# Altium PCB LM2596.PcbDoc
Units mm, origin at the board's own origin, x right, y up, seen from the top; angles counter-clockwise.
Board outline 45 x 31 mm, 2 copper layers (Top Layer, Bottom Layer), stack 1.471 mm thick; 7 components, 5 nets, 26 pads, 50 vias.
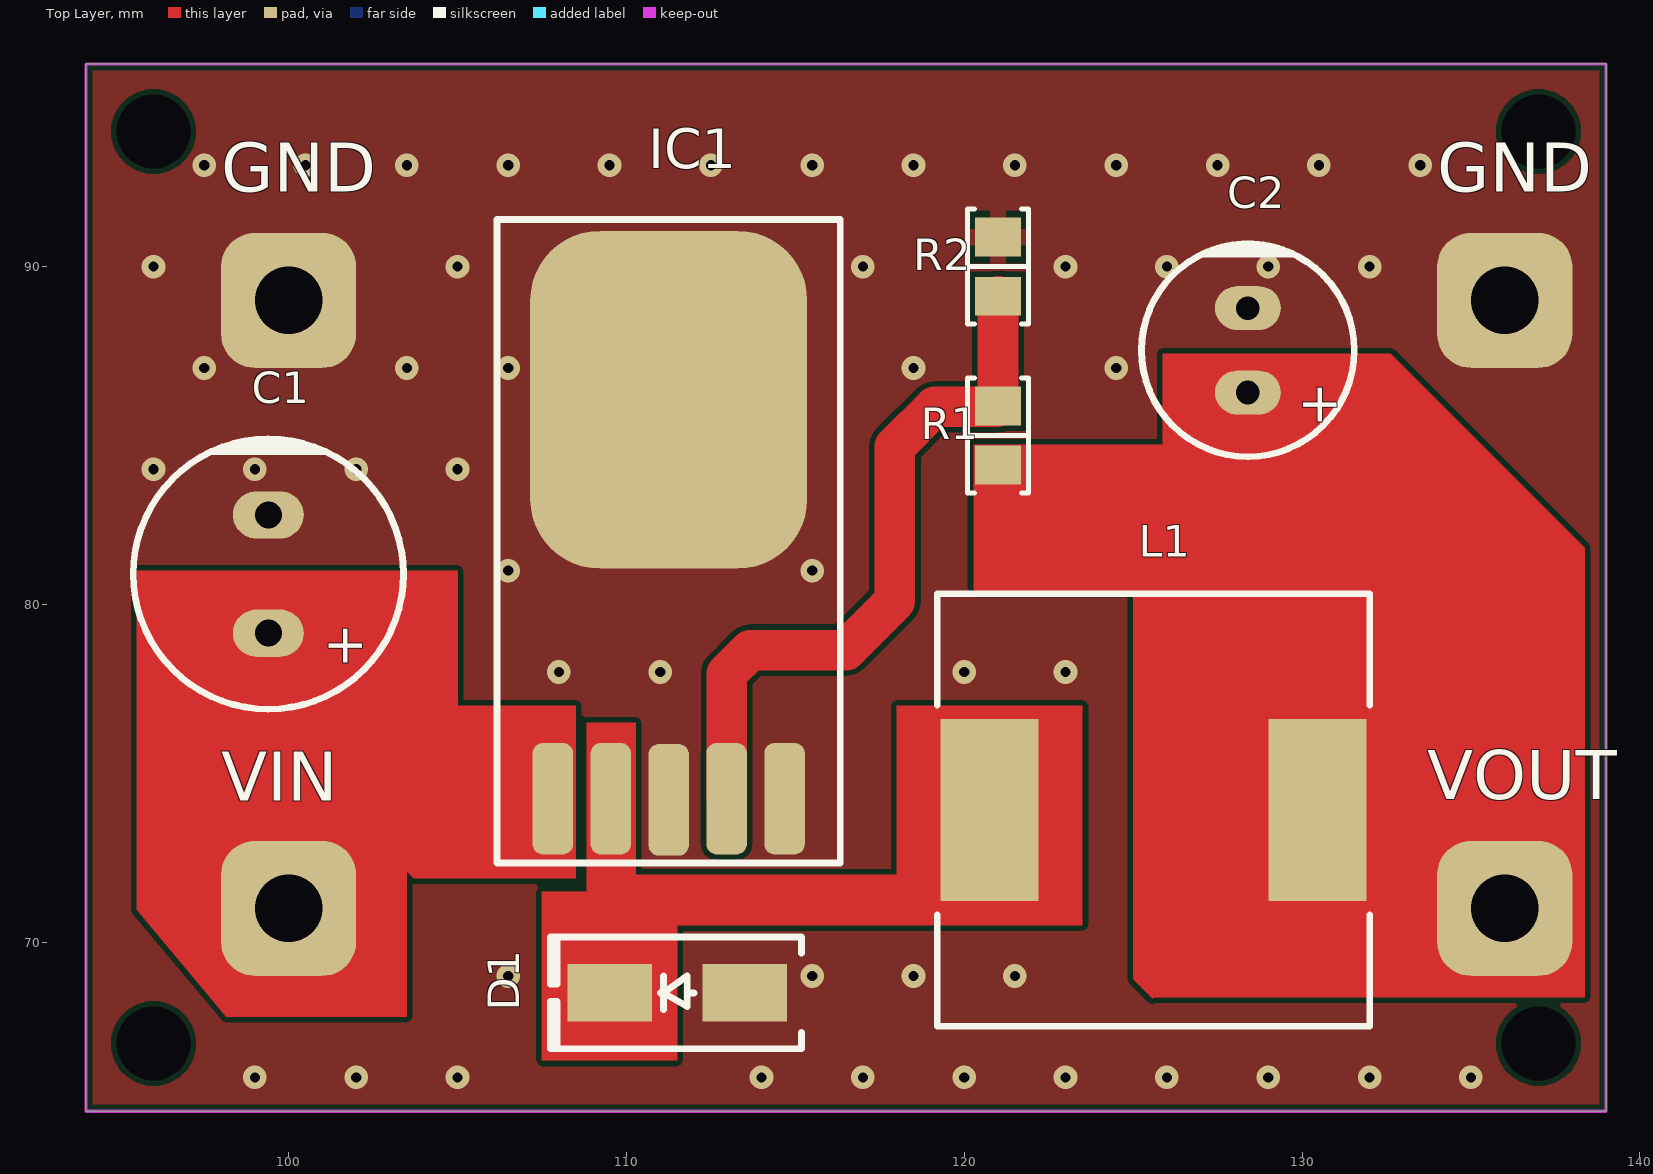
[diagram p0: Top Layer view]
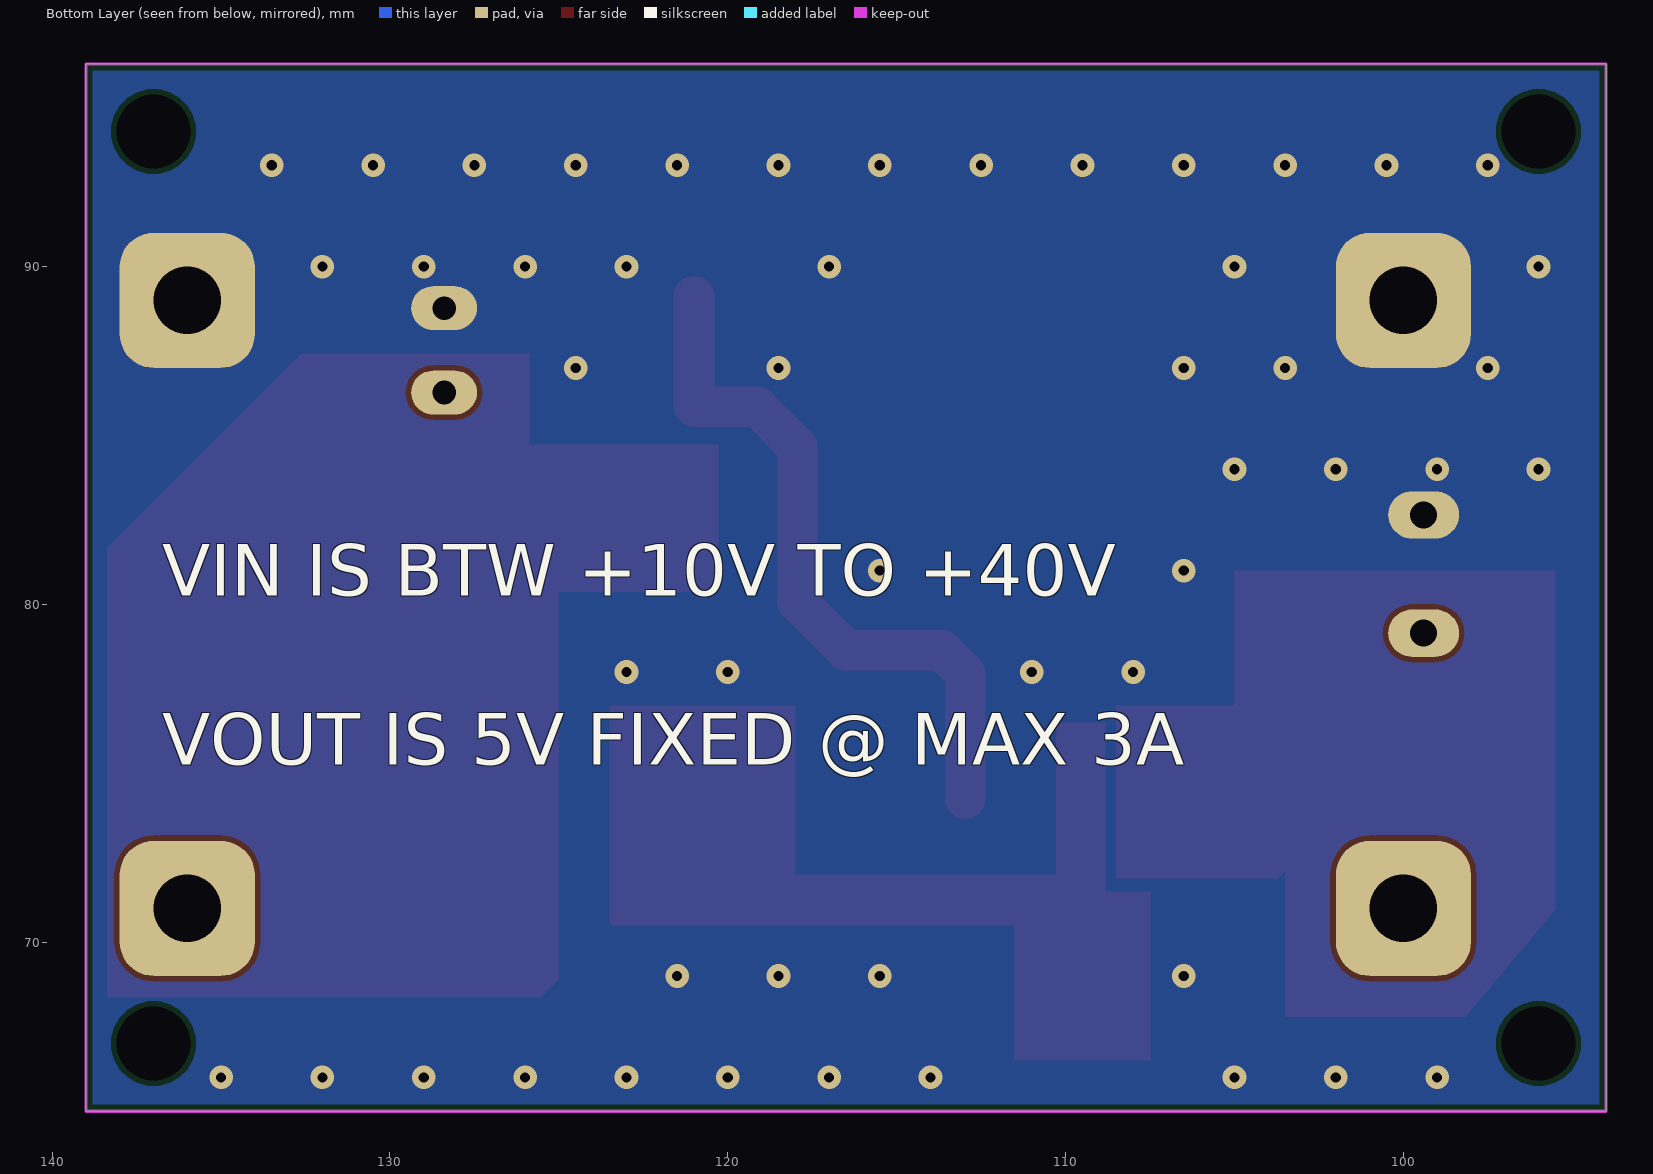
[diagram p1: Bottom Layer view, seen from below]
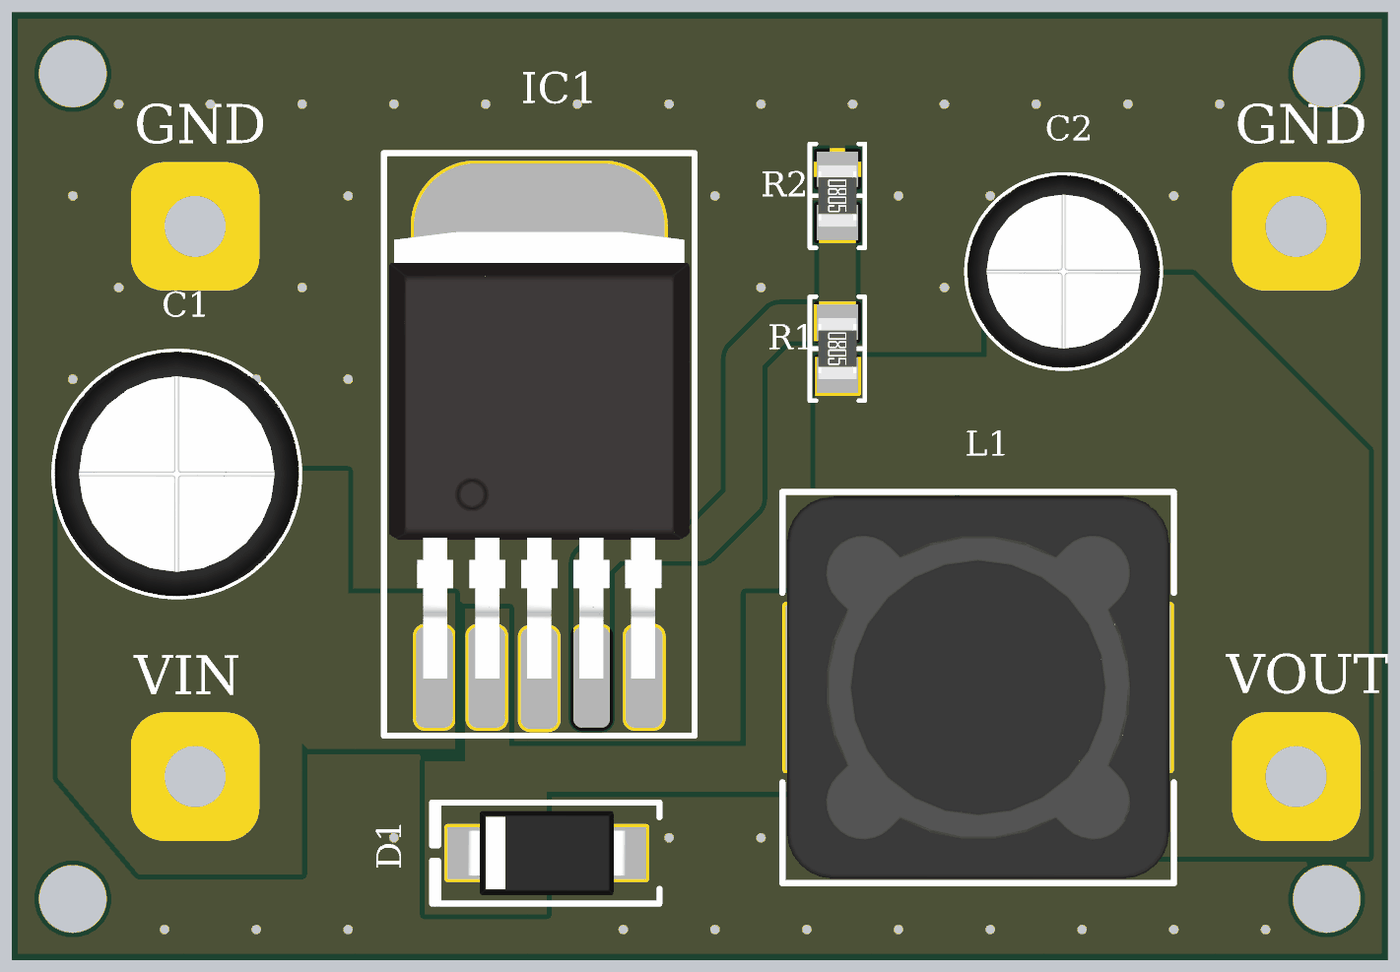
[diagram p2: 3D render of the assembled board from above, using the file's embedded part models]

## Layer stack, top to bottom
Top Solder: solder mask 0.0102, Solder Resist, Dk 3.5
Top Layer: signal copper 0.0356
Dielectric 1: dielectric 1.4, FR-4, Dk 4.8
Bottom Layer: signal copper 0.0356
Bottom Solder: solder mask 0.0102, Solder Resist, Dk 3.5

## Board outline
94,65 94,96 139,96 139,65

## Design rules (kind name [scope] priority, off if disabled: settings)
Clearance [All] p1: gap=0.152 ignorepadtopadclearanceinfootprint=FALSE
ComponentClearance [All] p1: gap=0.2 collisioncheckmode=3 verticalgap=0.2 showdistances=FALSE
HoleSize [All] p1: absolutevalues=TRUE maxlimit=5 minlimit=0.025 maxpercent=80.000 minpercent=20.000
PolygonConnect [All] p1: thpad.connectstyle=Direct thpad.reliefconductorwidth=0.254 thpad.reliefentries=4 thpad.polygonreliefangle="90 Angle" thpad.airgapwidth=0.254 smdpad.connectstyle=Relief smdpad.reliefconductorwidth=0.5 smdpad.reliefentries=4 smdpad.polygonreliefangle="90 Angle" smdpad.airgapwidth=0.2 via.connectstyle=Direct via.reliefconductorwidth=0.254 via.reliefentries=4 via.polygonreliefangle="90 Angle" via.airgapwidth=0.254
RoutingVias [All] p1: holewidth=0.711 width=1.27 viastyle="Through Hole" minholewidth=0.711 minwidth=1.27 maxholewidth=0.711 maxwidth=1.27
SolderMaskExpansion [All] p1: expansion=0.102 istentingtop=FALSE
Width [All] p1: maxlimit=2 minlimit=0.152 preferedwidth=0.5
28 further rules are at their usual default settings.

## Components (designator, comment, footprint, x,y, rotation, side; value= is the part's Value field where it differs from the comment)
C1 "100µF" "CAP TH ALUM ELEC D8.00mm S3.50mm H12.50mm" 99.4,80.9 r270 top
C2 "220µF" "CAP TH ALUM ELEC D6.30mm S2.50mm H12.50mm" 128.397,87.523 r270 top
D1 "ACDBA560-HF" "DO214AC SMA" 111.5,68.5 r180 top
IC1 "LM2596" LM2596 111.252,80.137 r0 top
L1 "33µH" "BOURNS SRR1280" 125.603,73.914 r0 top
R1 "3 kOhms" "RES 0805_2012" 121,85 r270 top
R2 "1 kOhms" "RES 0805_2012" 121,90 r270 top

## Footprints (in the part's own frame and the unit in brackets; to place one, negate y for a bottom-side part, rotate by r counter-clockwise, add the part's x,y. Pads: shape width x height; smd on the part's side, far side on the other; paste and mask are expansions set on the pad)
"BOURNS SRR1280" [mm] "Precision Wire Wound Inductor, 2-Leads, Body 12.50x12.50mm, IPC Medium Density"
  rect 2.9x5.4 smd: 1(-4.85,0) 2(4.85,0)
  silkscreen extent -6.4,-6.4 6.4,6.4, body extent -6.25,-6.25 6.25,6.25, height 7.9
"CAP TH ALUM ELEC D6.30mm S2.50mm H12.50mm" [mm] "6.3mm Diameter 2.5mm Lead Spacing Aluminum Electrolytic Capacitors Radial, Can"
  oval 1.3x1.95 hole 0.7: 1(1.25,0) 2(-1.25,0)
  silkscreen extent -3.15,-3.15 3.15,3.15, body extent -3.16,-3.15 3.15,3.15, height 12.5
"CAP TH ALUM ELEC D8.00mm S3.50mm H12.50mm" [mm] "8mm Diameter 3.5mm Lead Spacing Aluminum Electrolytic Capacitors Radial, Can"
  oval 1.4x2.1 hole 0.8: 1(1.75,0) 2(-1.75,0)
  silkscreen extent -4,-4 4,4, body extent -4.01,-4 4,4, height 12.5
"DO214AC SMA" [mm] "Molded Diode, 2-Leads, Body 4.30x2.60mm, IPC Medium Density"
  rect 2.5x1.7 smd: 1(-2,0) 2(2,0)
  silkscreen extent -3.68,-1.65 3.75,1.65, body extent -2.6,-1.37 2.6,1.37, height 2.4
LM2596 [mm]
  rrect50% 1.2x3.3 smd: 1(-3.429,-5.888) 2(-1.714,-5.888) 3(0,-5.923) 4(1.714,-5.888) 5(3.429,-5.888)
  rrect50% 8.2x10 smd: 3(0,5.923)
  silkscreen extent -5.08,-7.79 5.08,11.26, body extent -4.91,-5.92 4.91,8.68, height 4.22
"RES 0805_2012" [mm] "Chip Resistor, 2-Leads, Body 2.00x1.25mm, IPC Medium Density"
  rect 1.15x1.35 smd: 1(-0.875,0) 2(0.875,0)
  silkscreen extent -1.7,-0.9 1.7,0.9, body extent -1,-0.62 1,0.63, height 0.6

## Part data
C1: library part ECA-1HM101, "CAP ALUM 100UF 20% 50V RADIAL", Device Package="Radial, Can", Lifetime @ Temp.="2000 Hrs @ 85°C", Manufacturer="Panasonic Electronic Components", Operating Temperature="-40°C ~ 85°C", Ripple Current @ High Frequency="425mA @ 10kHz", Ripple Current @ Low Frequency="250mA @ 120Hz", Supplier Part Number 1=P5182-ND, Tolerance=±20%, Voltage - Rated=50V, Applications="General Purpose", Capacitance=100µF, ComponentLink1Description=Datasheet, ComponentLink1URL=//media.digikey.com/pdf/Data%20Sheets/Panasonic%20Electronic%20Components/ECA-xxM%20Series,TypeA.pdf, ComponentLink2Description="DigiKey Link", ComponentLink2URL=http://digikey.com/product-detail/en/panasonic-electronic-components/ECA-1HM101/P5182-ND/245041, Height - Seated (Max)="0.492\" (12.50mm)", LastUpdated="7.09.2020 05:24:52", Lead Spacing="0.138\" (3.50mm)", Lifecycle Status=Active, Minimum Order=1, Mounting Type="Through Hole", Package / Case="Radial, Can", Packaging=Bulk, Part Number=ECA-1HM101, Part Status=Active, PartId=7199, Polarization=Polar, Price=0.31, Series=M, Size / Dimension="0.315\" Dia (8.00mm)", Supplier 1=DigiKey
C2: library part 25YXJ220M6.3X11, "CAP ALUM 220UF 20% 25V RADIAL", Device Package="Radial, Can", Lifetime @ Temp.="7000 Hrs @ 105°C", Manufacturer=Rubycon, Operating Temperature="-40°C ~ 105°C", Ripple Current @ High Frequency="400mA @ 100kHz", Ripple Current @ Low Frequency="280mA @ 120Hz", Supplier Part Number 1=1189-2913-ND, Tolerance=±20%, Voltage - Rated=25V, Applications="General Purpose", Capacitance=220µF, ComponentLink1Description=Datasheet, ComponentLink1URL=http://www.rubycon.co.jp/en/catalog/e_pdfs/aluminum/e_yxj.pdf, ComponentLink2Description="DigiKey Link", ComponentLink2URL=http://digikey.com/product-detail/en/rubycon/25YXJ220M6.3X11/1189-2913-ND/3563124, Height - Seated (Max)="0.492\" (12.50mm)", LastUpdated="4.09.2020 01:05:50", Lead Spacing="0.098\" (2.50mm)", Lifecycle Status=Active, Minimum Order=1, Mounting Type="Through Hole", Package / Case="Radial, Can", Packaging=Bulk, Part Number=25YXJ220M6.3X11, Part Status=Active, PartId=20944, Polarization=Polar, Price=0.27, Series=YXJ, Size / Dimension="0.248\" Dia (6.30mm)", Supplier 1=DigiKey, Impedance="220 mOhms"
D1: "DIODE SCHOTTKY 60V 5A DO214AC", Capacitance @ Vr, F="250pF @ 4V, 1MHz", Current - Average Rectified (Io)="5A (DC)", Current - Reverse Leakage @ Vr="500µA @ 60V", Manufacturer="Comchip Technology", Operating Temperature - Junction="-55°C ~ 125°C", Package / Case="DO-214AC, SMA", Supplier Device Package="DO-214AC (SMA)", Supplier Part Number 1=641-2078-1-ND, Voltage - DC Reverse (Vr) (Max)=60V, Voltage - Forward (Vf) (Max) @ If="700mV @ 5A", ComponentLink1Description=Datasheet, ComponentLink1URL=http://www.comchiptech.com/admin/files/product/ACDBA560-HF%20RevA201382.pdf, ComponentLink2Description="DigiKey Link", ComponentLink2URL=http://digikey.com/product-detail/en/comchip-technology/ACDBA560-HF/641-2078-1-ND/10131664, Diode Type=Schottky, LastUpdated="2.09.2020 01:19:04", Lifecycle Status=Active, Minimum Order=1, Mounting Type="Surface Mount", Packaging=TapeAndReel, Part Number=ACDBA560-HF, Part Status=Active, PartId=1832, Price=0.13, Series="Automotive, AEC-Q101", Speed="Fast Recovery =< 500ns, > 200mA (Io)", Supplier 1=DigiKey
L1: library part SRR1280-330M, "FIXED IND 33UH 3.5A 57 MOHM SMD", Current - Saturation=3.3A, Current Rating (Amps)=3.5A, DC Resistance (DCR)="57mOhm Max", Device Package=Nonstandard, Frequency - Self Resonant=9.5MHz, Manufacturer="Bourns Inc.", Operating Temperature="-40°C ~ 125°C", Q @ Freq="28 @ 2.52MHz", Supplier Part Number 1=SRR1280-330MCT-ND, Tolerance=±20%, Inductance Frequency - Test=100kHz, ComponentLink1Description=Datasheet, ComponentLink1URL=https://www.bourns.com/docs/Product-Datasheets/SRR1280.pdf, ComponentLink2Description="DigiKey Link", ComponentLink2URL=http://digikey.com/product-detail/en/bourns-inc/SRR1280-330M/SRR1280-330MCT-ND/2127440, Height - Seated (Max)="0.315\" (8.00mm)", LastUpdated="2.09.2020 01:22:09", Lifecycle Status=Active, Material - Core=Ferrite, Minimum Order=1, Mounting Type="Surface Mount", Package / Case=Nonstandard, Packaging=TapeAndReel, Part Number=SRR1280-330M, Part Status=Active, PartId=25, Price=0.65, Series=SRR1280, Shielding=Shielded, Size / Dimension="0.492\" L x 0.492\" W (12.50mm x 12.50mm)", Supplier 1=DigiKey, Type=Wirewound, Inductance=33µH
R1: library part RPC0805JT3K00, "RES 3K OHM 5% 1/4W 0805", Device Package="0805 (2012 Metric)", Manufacturer="Stackpole Electronics Inc", Operating Temperature="-55°C ~ 155°C", Power (Watts)="0.25W, 1/4W", Ratings=AEC-Q200, Supplier Device Package=0805, Supplier Part Number 1=RPC0805JT3K00CT-ND, Temperature Coefficient=±100ppm/°C, Tolerance=±5%, ComponentLink1Description=Datasheet, ComponentLink1URL=https://www.seielect.com/catalog/sei-rpc.pdf, ComponentLink2Description="DigiKey Link", ComponentLink2URL=http://digikey.com/product-detail/en/stackpole-electronics-inc/RPC0805JT3K00/RPC0805JT3K00CT-ND/5766019, Composition="Thick Film", Features="Automotive AEC-Q200, Pulse Withstanding", Height - Seated (Max)="0.024\" (0.60mm)", LastUpdated="2.09.2020 01:14:56", Lifecycle Status=Active, Minimum Order=1, Number of Terminations=2, Package / Case="0805 (2012 Metric)", Packaging=TapeAndReel, Part Number=RPC0805JT3K00, Part Status=Active, PartId=40639, Price=0.02, Resistance="3 kOhms", Series=RPC, Size / Dimension="0.079\" L x 0.049\" W (2.00mm x 1.25mm)", Supplier 1=DigiKey
R2: library part RPC0805JT1K00, "RES 1K OHM 5% 1/4W 0805", Device Package="0805 (2012 Metric)", Manufacturer="Stackpole Electronics Inc", Operating Temperature="-55°C ~ 155°C", Power (Watts)="0.25W, 1/4W", Ratings=AEC-Q200, Supplier Device Package=0805, Supplier Part Number 1=RPC0805JT1K00CT-ND, Temperature Coefficient=±100ppm/°C, Tolerance=±5%, ComponentLink1Description=Datasheet, ComponentLink1URL=https://www.seielect.com/catalog/sei-rpc.pdf, ComponentLink2Description="DigiKey Link", ComponentLink2URL=http://digikey.com/product-detail/en/stackpole-electronics-inc/RPC0805JT1K00/RPC0805JT1K00CT-ND/3043931, Composition="Thick Film", Features="Automotive AEC-Q200, Pulse Withstanding", Height - Seated (Max)="0.024\" (0.60mm)", LastUpdated="2.09.2020 01:14:52", Lifecycle Status=Active, Minimum Order=1, Number of Terminations=2, Package / Case="0805 (2012 Metric)", Packaging=TapeAndReel, Part Number=RPC0805JT1K00, Part Status=Active, PartId=42221, Price=0.02, Resistance="1 kOhms", Series=RPC, Size / Dimension="0.079\" L x 0.049\" W (2.00mm x 1.25mm)", Supplier 1=DigiKey

## Free pads (board coordinates)
  rrect50% 0x0 hole 2.2: GND(96,67) GND(96,94) GND(137,67) GND(137,94)
  rrect50% 4x4 hole 2: GND(100,89) GND(136,89) VIN(100,71) VOUT(136,71)

## Via types
v1: diameter 0.7, hole 0.3, Top Layer to Bottom Layer, tented both sides, 50 vias

## Nets (pads, with @x,y where several pads share a name; then routed paths per layer and width w, separated by ;. In a path a pad name is that pad's centre, name@x,y a point inside that pad or via, vN(x,y) a via of type N, cw(c..) or ccw(c..) an arc to the next point about the centre after c; other vN are vias at no path point)
+5: C2.1 L1.2 pad.VOUT R1.2
FeedBack: IC1.4 R1.1 R2.2 | length 20.9
  Top Layer w1.2: IC1.4 112.966,77.947 113.669,78.65 116.5,78.65 117.95,80.1 117.95,84.675 119.125,85.85 120.975,85.85 R1.1 R2.2
GND: C1.2 C2.2 D1.1 IC1.3 IC1.5 pad.GND@100,89 pad.GND@136,89 R2.1
  other v1: 99,66 102,66 105,66 114,66 117,66 120,66 123,66 126,66 129,66 132,66 135,66 106.5,69 115.5,69 118.5,69 121.5,69 108,78 111,78 120,78 123,78 106.5,81 115.5,81 96,84 99,84 102,84 105,84 97.5,87 103.5,87 106.5,87 118.5,87 124.5,87 96,90 105,90 117,90 123,90 126,90 129,90 132,90 97.5,93 100.5,93 103.5,93 106.5,93 109.5,93 112.5,93 115.5,93 118.5,93 121.5,93 124.5,93 127.5,93 130.5,93 133.5,93
NetD1_2: D1.2 IC1.2 L1.1
VCC: C1.1 IC1.1 pad.VIN

## Polygon pours and split planes (outlines as drawn)
GND on Bottom Layer "GND_L02_P000" (solid, pour order 0): 94,96 139,96 139,65 138.792,65.208 94,65.208 94,96
GND on Top Layer "GND_L01_P001" (solid, pour order 1): 94,96 139,96 139,65 138.792,65.208 94,65.208 94,96

## Keep-outs
Keep-Out Layer:
  the board outline again, w0.1

## Other copper
Top Layer:
  region net +5: 125.875,84.725 125.875,87.425 132.625,87.425 138.375,81.675 138.375,68.375 125.625,68.375 125.575,68.325 125,68.9 125,80.375 120.35,80.375 120.275,80.45 120.275,84.725
  region net VCC: 105,81 105,77 108.5,77 108.5,71.9 103.7,71.9 103.5,72.1 103.5,67.8 98.155,67.8 95.5,70.965 95.5,81
  region net NetD1_2: 110.275,76.5 110.275,72 118,72 118,77 123.5,77 123.5,70.5 111.5,70.5 111.5,66.5 107.5,66.5 107.5,71.5 108.825,71.5 108.825,76.5

## Silkscreen, mask and mechanical layers (free items; w line width, h text height)
Top Overlay:
  text "GND" at 98.002,91.725 h2.5
  text "GND" at 134.002,91.725 h2.5
  text "VOUT" at 133.702,73.737 h2.5
  text "VIN" at 98.002,73.7 h2.5
Bottom Overlay:
  text "VIN IS BTW +10V TO +40V" at 136.746,80.254 h1.52
  text "VOUT IS 5V FIXED @ MAX 3A" at 136.746,75.254 h1.52

## Text inside footprints (layer, text, board x,y; h text height)
C1: Top Overlay "+" at 100.8,79.45 h2 r270
C2: Top Overlay "+" at 129.647,86.573 h2 r270